# Altium PCB STM32F4Trunk.PcbDoc
Units mm, origin at the board's own origin, x right, y up, seen from the top; angles counter-clockwise.
Board outline 85.1 x 83.9 mm, 4 copper layers (Top Layer, Layer 1, Layer 2, Bottom Layer), stack 0.602 mm thick; 56 components, 48 nets, 292 pads, 7 vias.
Unrouted connection lines stored in the file: 160.
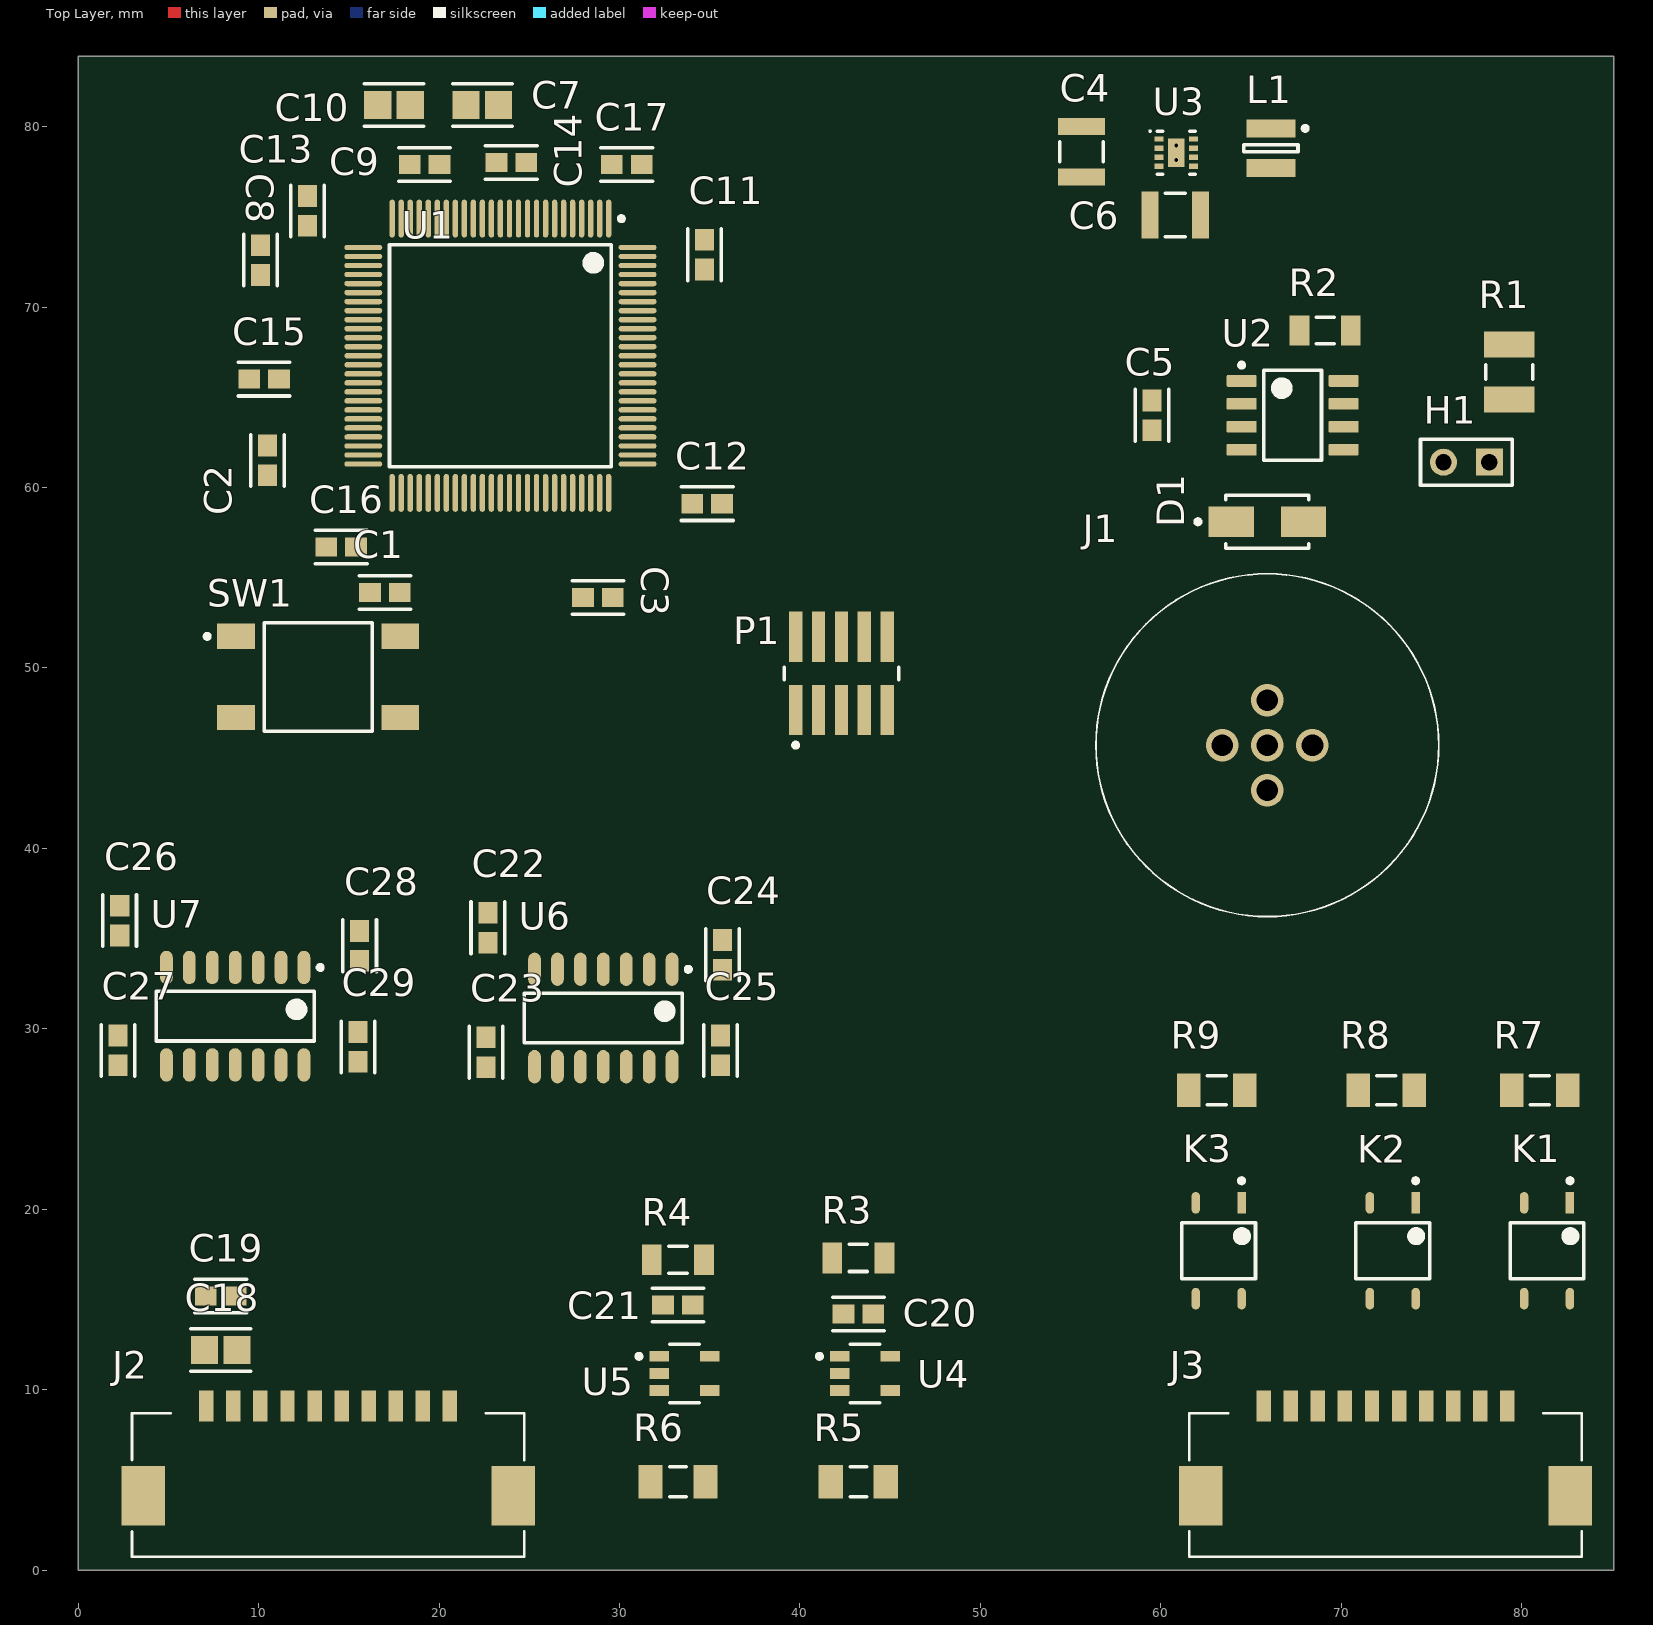
[diagram p0: Top Layer view]
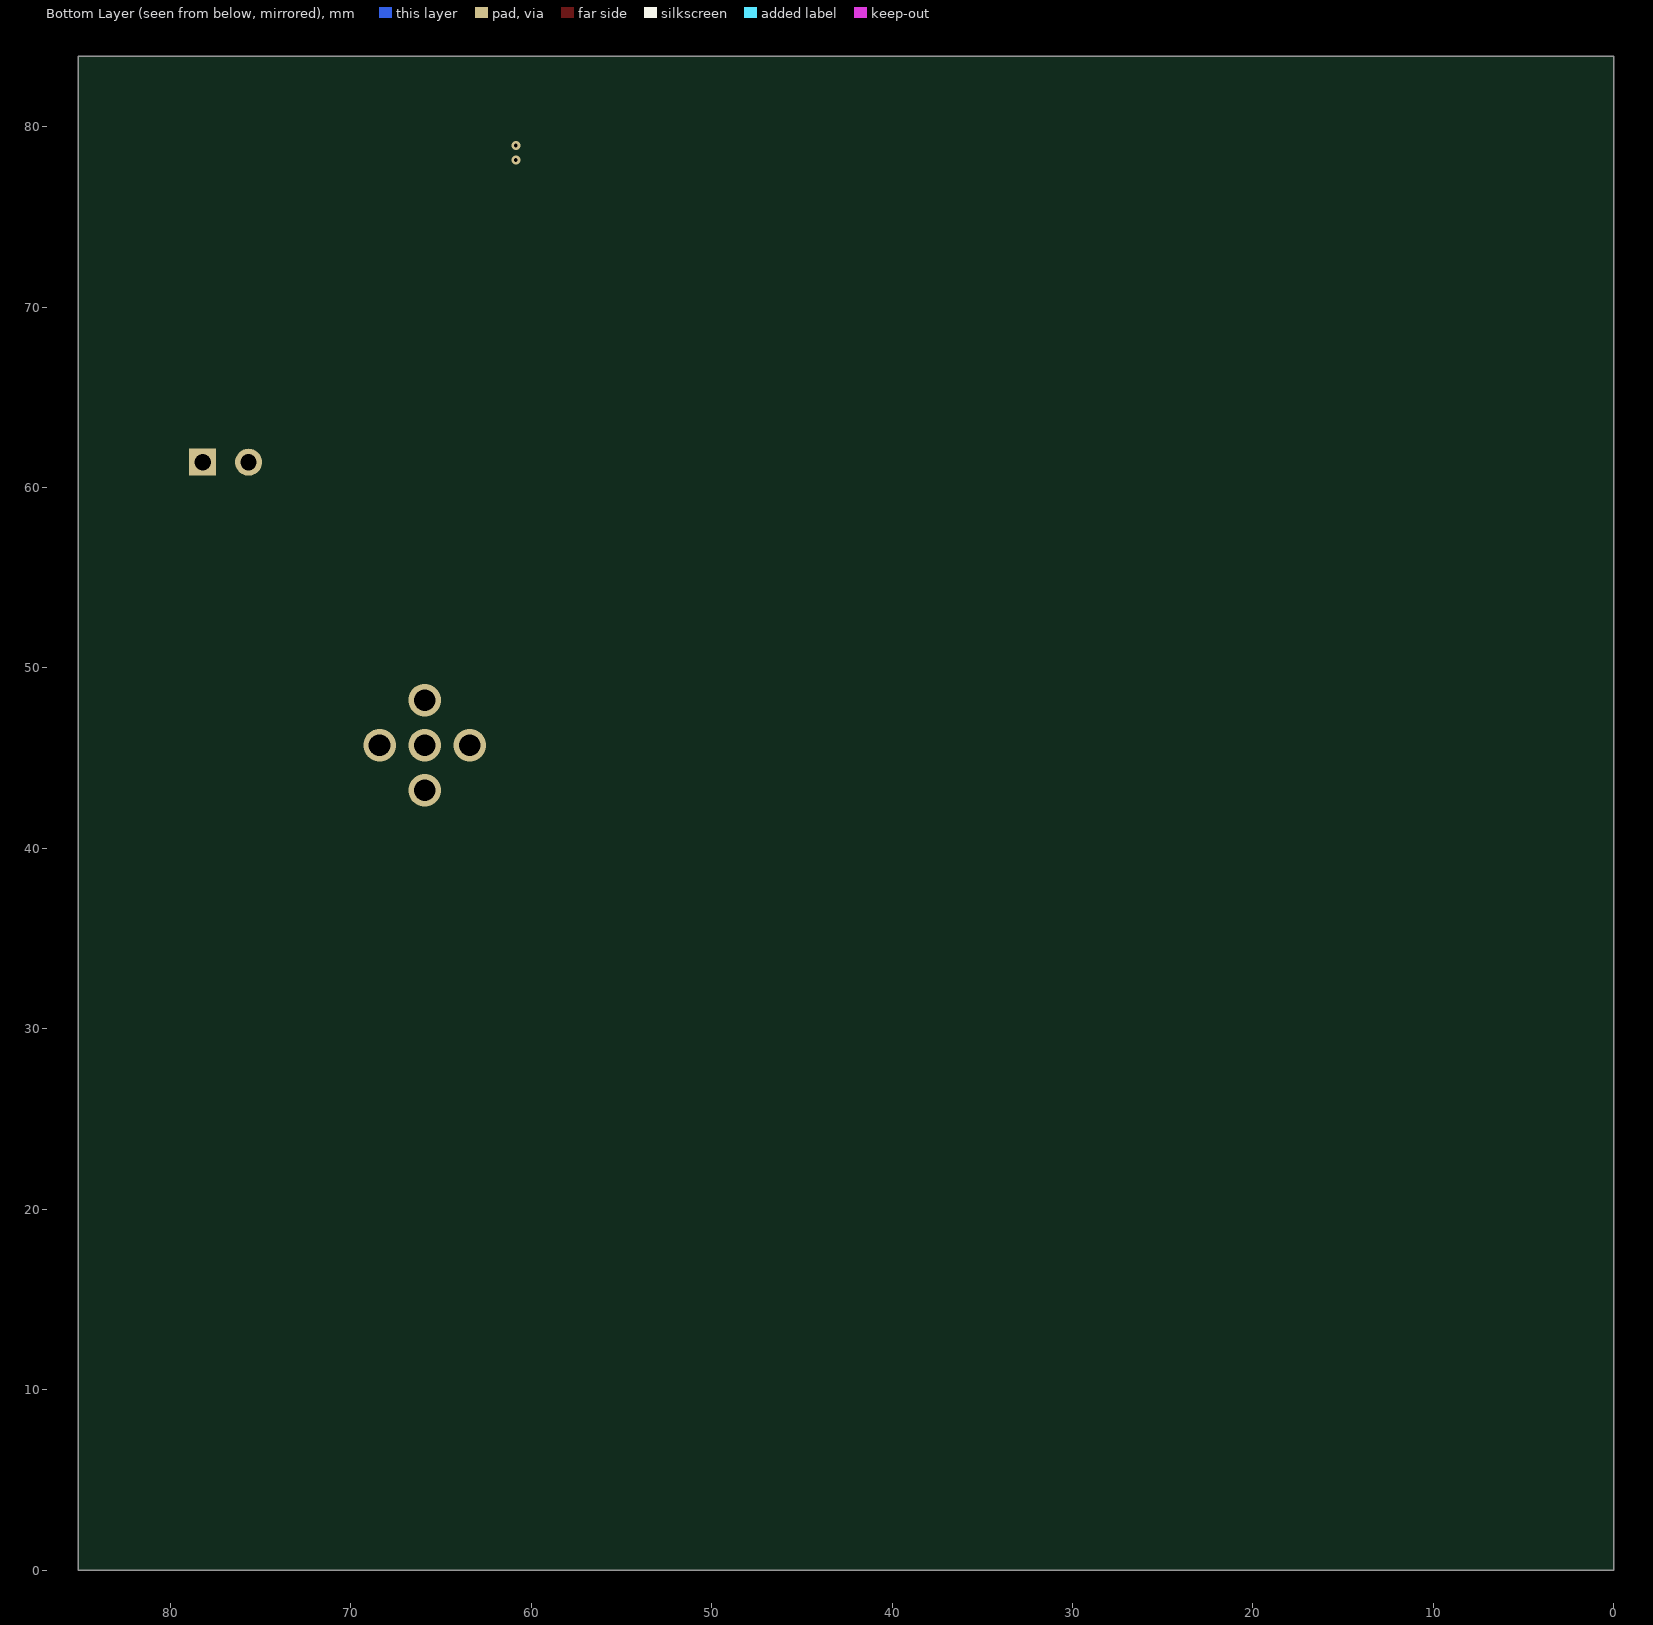
[diagram p1: Bottom Layer view, seen from below]
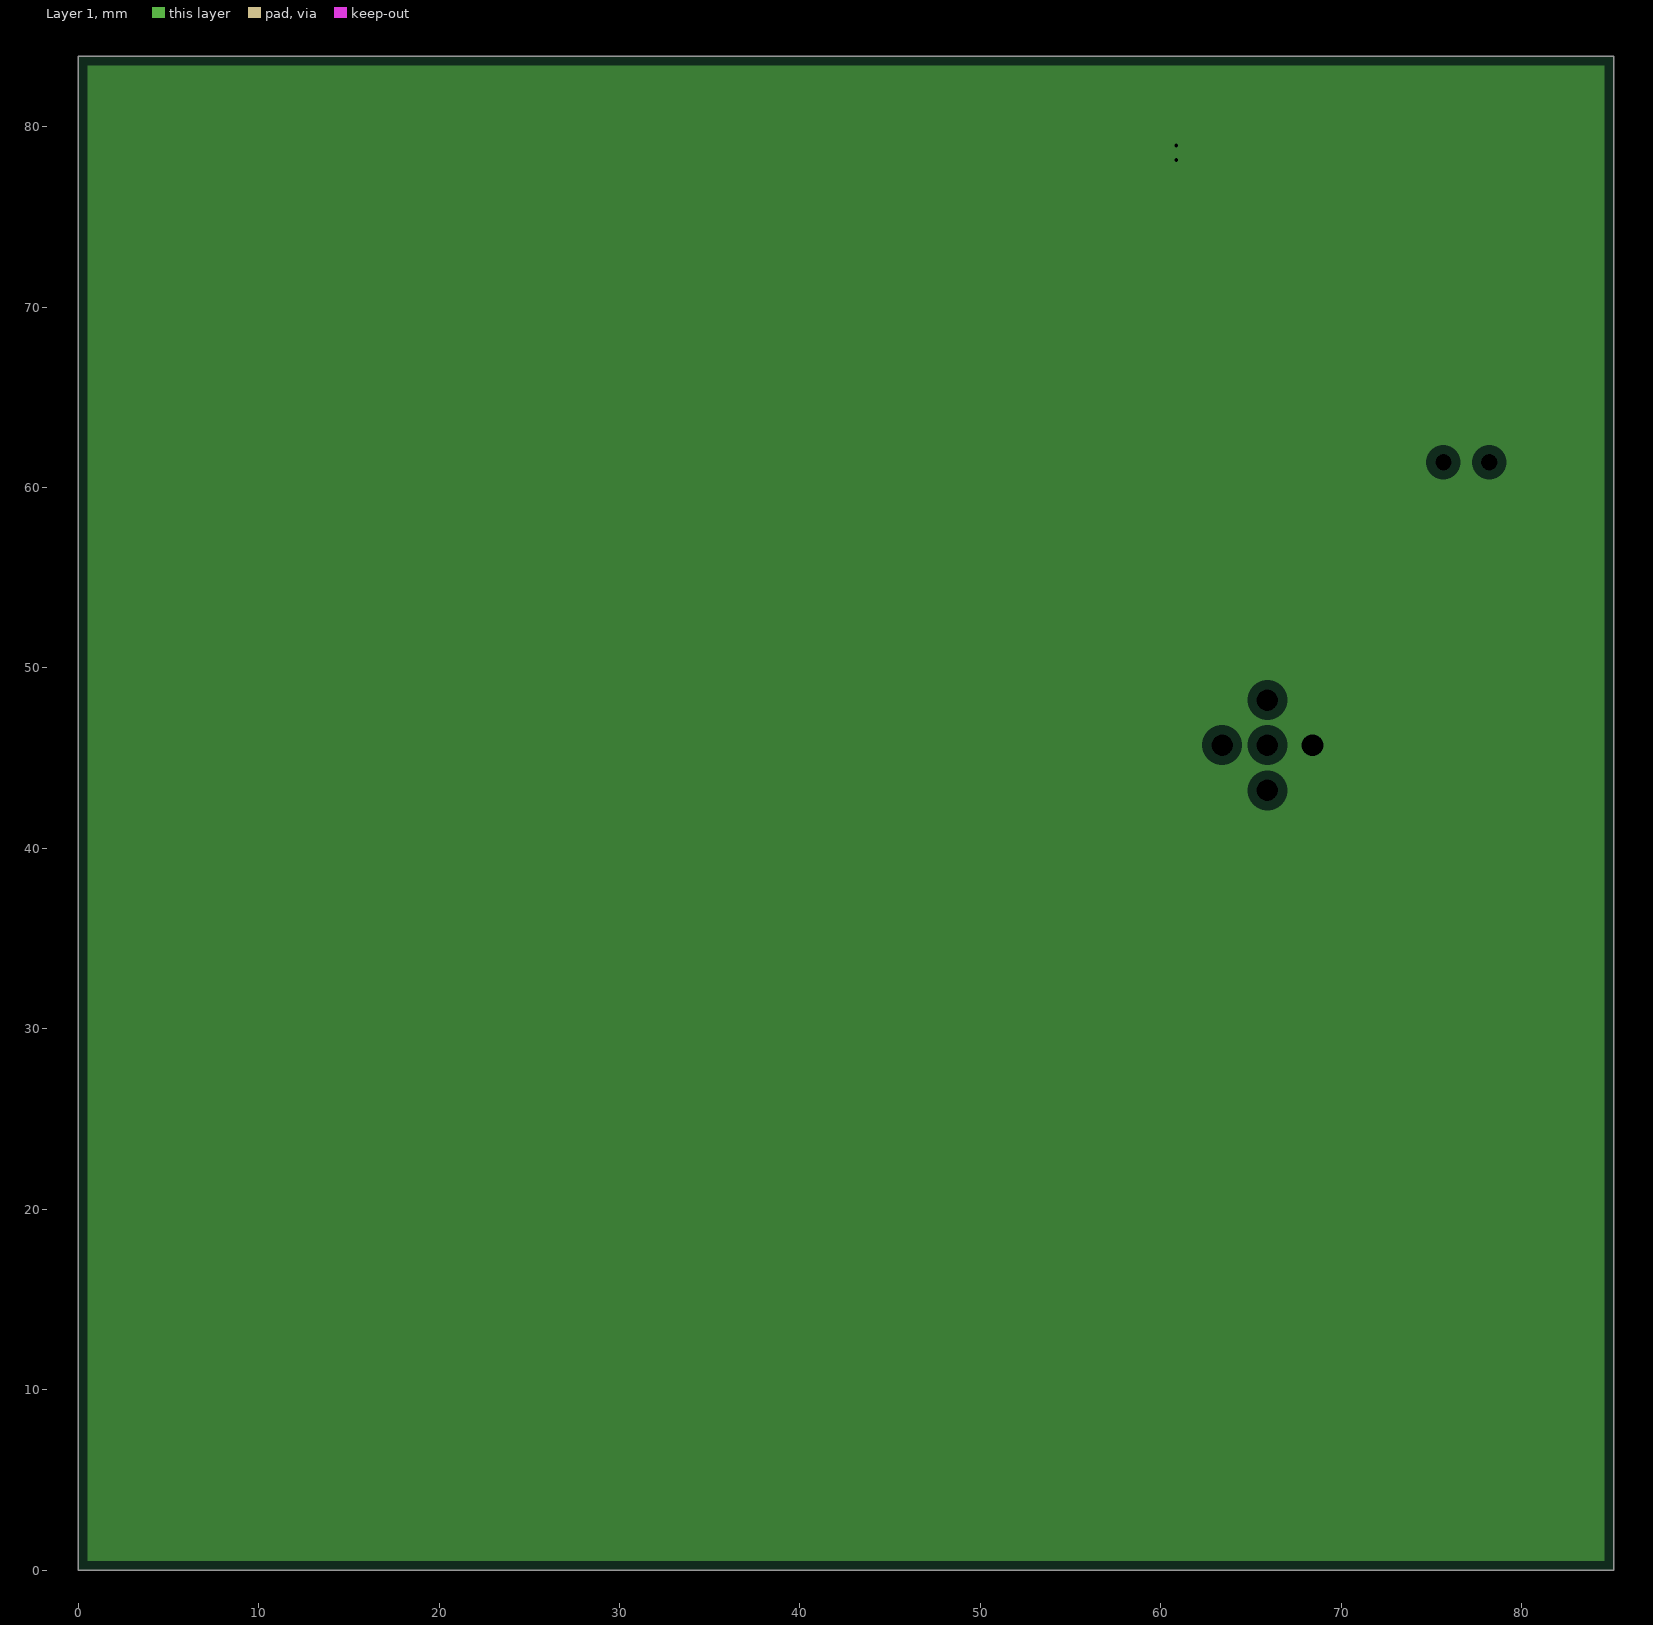
[diagram p2: Layer 1, clearances drawn from the general rule]
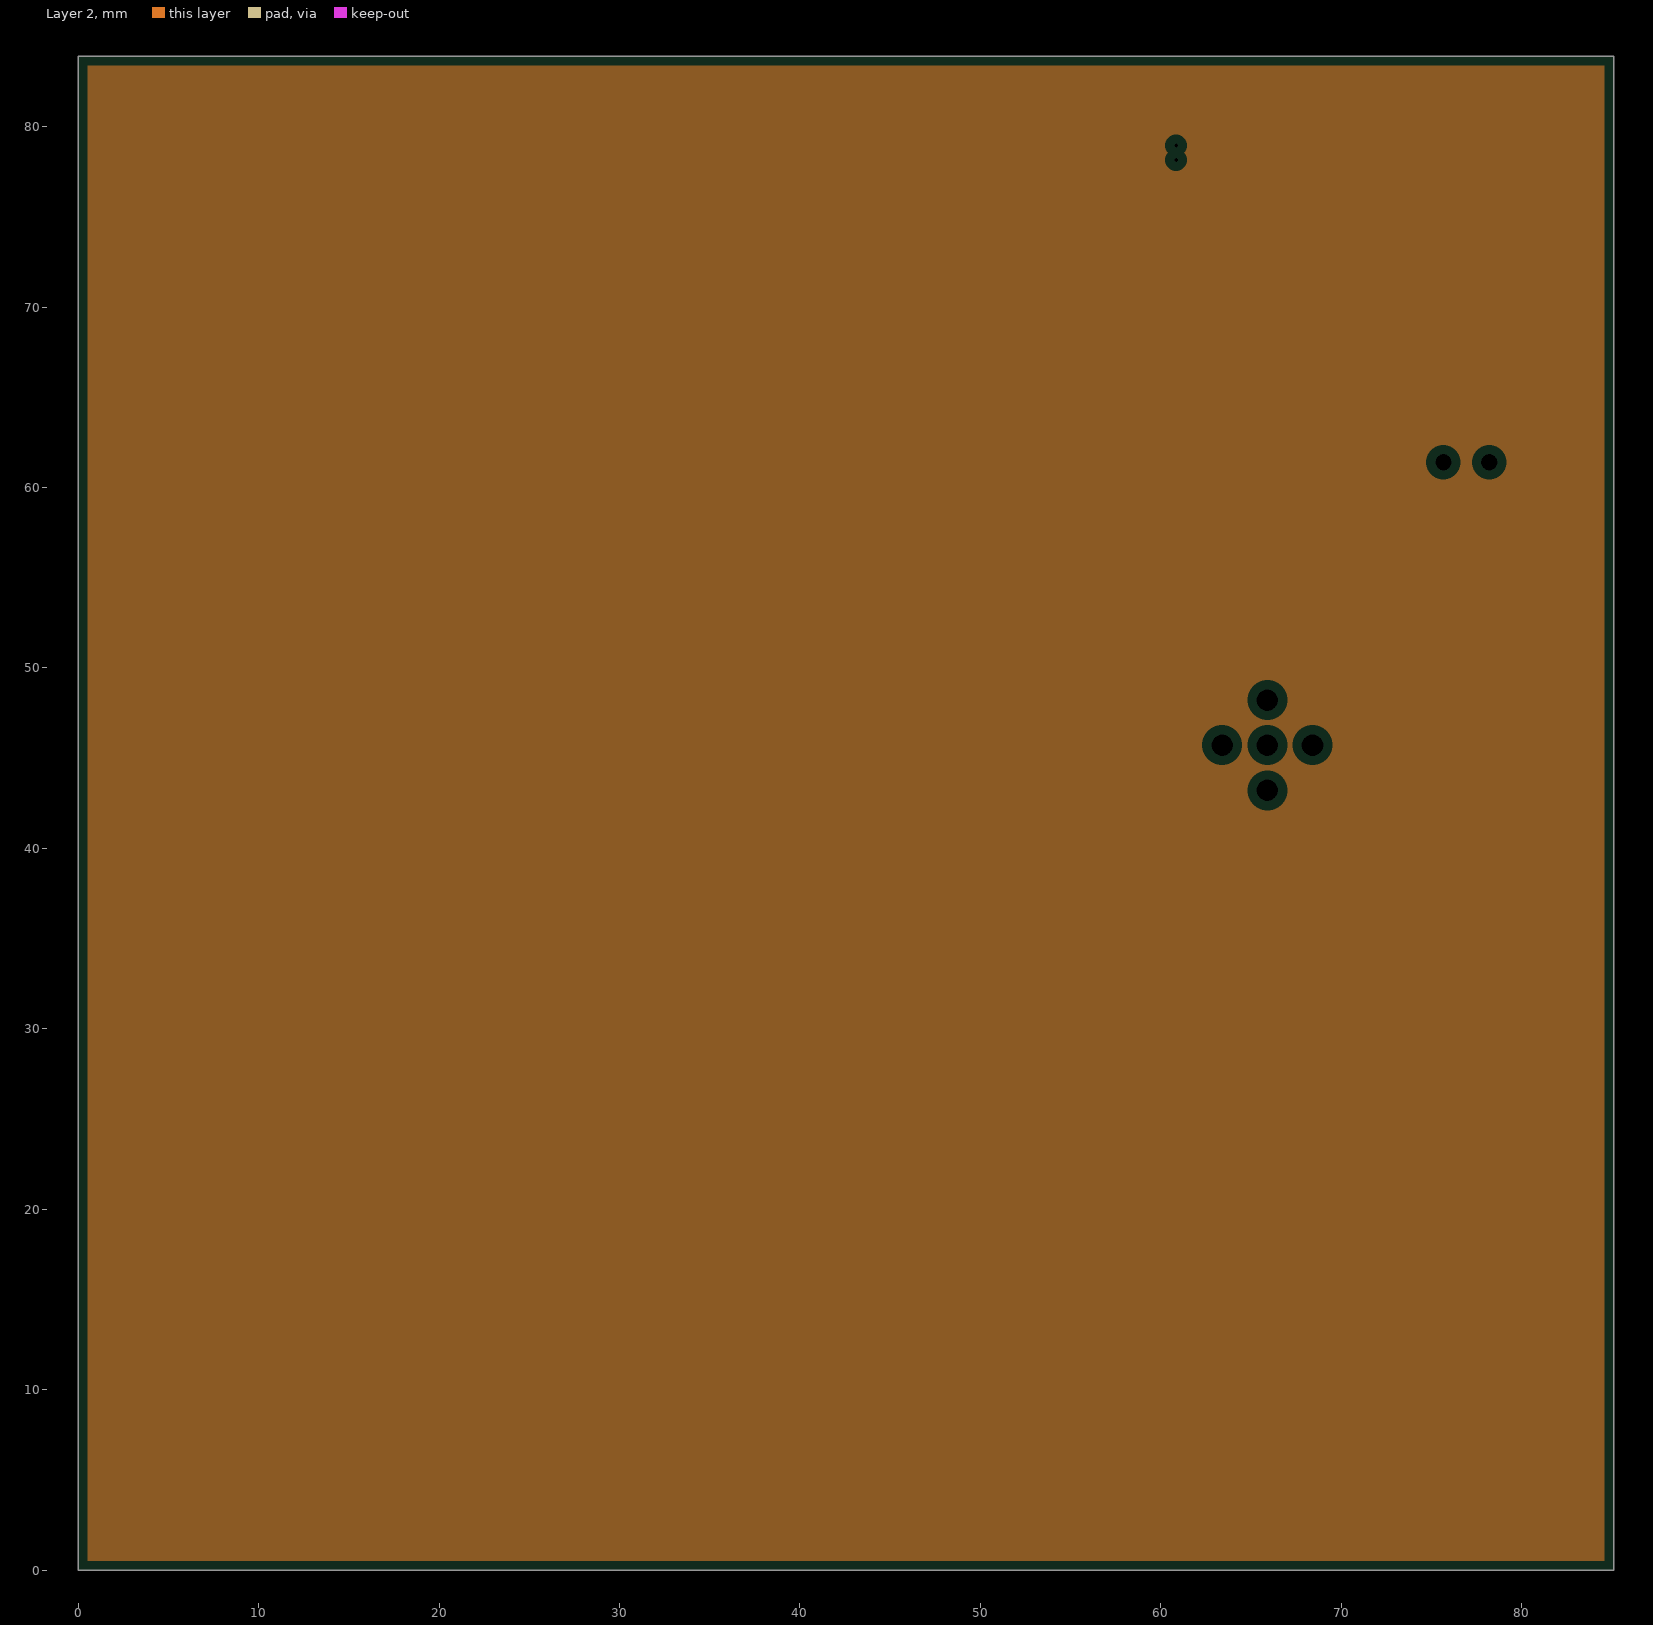
[diagram p3: Layer 2, clearances drawn from the general rule]

## Layer stack, top to bottom
Top Solder: solder mask 0.0102, Solder Resist, Dk 3.5
Top Layer: signal copper 0.035
Dielectric 2: prepreg 0.0711, PP-006, Dk 4.1
Layer 1: plane copper 0.035, net GND
Dielectric 1: dielectric 0.32, FR-4, Dk 4.8
Layer 2: plane copper 0.035, net VCC
Dielectric 3: prepreg 0.0711, PP-006, Dk 4.1
Bottom Layer: signal copper 0.035
Bottom Solder: solder mask 0.0102, Solder Resist, Dk 3.5

## Board outline
0,0 85.1,0 85.1,83.9 0,83.9

## Design rules (kind name [scope] priority, off if disabled: settings)
Clearance [All] p1: gap=0.2 ignorepadtopadclearanceinfootprint=TRUE
MinimumSolderMaskSliver [All] p1: minsoldermaskwidth=0.04
PlaneClearance [All] p1: clearance=0.508
PlaneConnect [All] p1: planeconnectstyle=Relief reliefexpansion=0.508 reliefentries=4 reliefconductorwidth=0.254 reliefairgap=0.254
PolygonConnect [All] p1: connectstyle=Relief reliefconductorwidth=0.254 reliefentries=4 polygonreliefangle="90 Angle" airgapwidth=0.254
RoomDefinition ICs [InComponentClass('ICs')] p1: confinementstyle=ConfineIn formatcopy=TRUE lockcomponents=FALSE outline 0.7,-0.3 86.1,-0.3 86.1,42.7 0.7,42.7
RoomDefinition PowerSupply [InComponentClass('PowerSupply')] p2: confinementstyle=ConfineIn formatcopy=TRUE lockcomponents=FALSE outline 52.5,70.2 82.6,70.2 82.6,83.2 52.5,83.2
RoomDefinition Microcontroller [InComponentClass('Microcontroller')] p3: confinementstyle=ConfineIn formatcopy=TRUE lockcomponents=FALSE outline -0.5,43.3 50.175,43.3 50.175,83 -0.5,83
RoomDefinition Connector [InComponentClass('Connector')] p4: confinementstyle=ConfineIn formatcopy=TRUE lockcomponents=FALSE outline 1.699,-9.122 85.2,-9.122 85.2,17.1 1.699,17.1
RoomDefinition CAN [InComponentClass('CAN')] p5: confinementstyle=ConfineIn formatcopy=TRUE lockcomponents=FALSE outline 49.9,34.5 83.075,34.5 83.075,71.1 49.9,71.1
RoutingVias [All] p1: holewidth=0.711 width=1.27 viastyle="Through Hole" minholewidth=0.711 minwidth=1.27 maxholewidth=0.711 maxwidth=1.27
SMDEntry [All] p1: side=TRUE corner=TRUE anyangle=TRUE
SMDNeckDown [All] p1: percent=100.000
SilkToSolderMaskClearance [IsPad] p1: minsilkscreentomaskgap=0.1 clearancetoexposedcopper=TRUE
SolderMaskExpansion [All] p1: expansion=0.102
Width Power [InNetClass('Power')] p1: maxlimit=0.5 minlimit=0.25 preferedwidth=0.5
Width Width_1 [All] p2: maxlimit=0.254 minlimit=0.254 preferedwidth=0.254
26 further rules are at their usual default settings.

## Classes and differential pairs
component class PowerSupply: C4 C6 L1 U3
component class ICs: C20 C21 C22 C23 C24 C25 C26 C27 C28 C29 K1 K2 K3 R3 R4 R5 R6 R7 R8 R9 U4 U5 U6 U7
net class Power: +12 GND VCC
component class Microcontroller: C1 C2 C3 C7 C8 C9 C10 C11 C12 C13 C14 C15 C16 C17 P1 SW1 U1
component class Connector: C18 C19 H2 J2 J3
component class CAN: C5 D1 H1 J1 R1 R2 U2

## Components (designator, comment, footprint, x,y, rotation, side; value= is the part's Value field where it differs from the comment)
C1 "C0603C104K5RACTU" Kemet_C0603_IPC_A 17,54.188 r180 top
C2 "CC0805KKX7R6BB225" Kemet_C0603_IPC_A 10.5,61.5 r270 top
C3 "CC0805KKX7R6BB225" Kemet_C0603_IPC_A 28.8,53.9 r0 top
C4 "CAP 22uF 16V X7R 1210(3225)" CAPC1210(3225)280_L 55.6,78.6 r90 top value=22uF
C5 "C0603C104K5RACTU" Kemet_C0603_IPC_A 59.5,64 r90 top
C6 "CAP 22uF 16V X7R 1210(3225)" CAPC1210(3225)280_L 60.8,75.1 r0 top value=22uF
C7 "CC0805KKX7R6BB225" Yageo_CC0805-0.85_IPC_A 22.4,81.2 r180 top
C8 "C0603C104K5RACTU" Kemet_C0603_IPC_A 10.1,72.6 r270 top
C9 "C0603C104K5RACTU" Kemet_C0603_IPC_A 19.2,77.9 r180 top
C10 "CC0805KKX7R6BB225" Yageo_CC0805-0.85_IPC_A 17.5,81.2 r180 top
C11 "C0603C104K5RACTU" Kemet_C0603_IPC_A 34.7,72.9 r90 top
C12 "C0603C104K5RACTU" Kemet_C0603_IPC_A 34.858,59.1 r180 top
C13 "C0603C104K5RACTU" Kemet_C0603_IPC_A 12.7,75.326 r90 top
C14 "C0603C104K5RACTU" Kemet_C0603_IPC_A 24,78 r0 top
C15 "C0603C104K5RACTU" Kemet_C0603_IPC_A 10.3,66 r0 top
C16 "C0603C104K5RACTU" Kemet_C0603_IPC_A 14.574,56.7 r180 top
C17 "C0603C104K5RACTU" Kemet_C0603_IPC_A 30.4,77.9 r0 top
C18 "CC0805KKX7R6BB225" Yageo_CC0805-0.85_IPC_A 7.901,12.2 r180 top
C19 "C0603C104K5RACTU" Kemet_C0603_IPC_A 7.9,15.2 r0 top
C20 "C0603C104K5RACTU" Kemet_C0603_IPC_A 43.237,14.2 r0 top
C21 "C0603C104K5RACTU" Kemet_C0603_IPC_A 33.237,14.692 r0 top
C22 "C0603C104K5RACTU" Kemet_C0603_IPC_A 22.7,35.6 r270 top
C23 "C0603C104K5RACTU" Kemet_C0603_IPC_A 22.6,28.7 r270 top
C24 "C0603C104K5RACTU" Kemet_C0603_IPC_A 35.7,34.1 r270 top
C25 "C0603C104K5RACTU" Kemet_C0603_IPC_A 35.6,28.8 r270 top
C26 "C0603C104K5RACTU" Kemet_C0603_IPC_A 2.3,36 r270 top
C27 "C0603C104K5RACTU" Kemet_C0603_IPC_A 2.2,28.8 r270 top
C28 "C0603C104K5RACTU" Kemet_C0603_IPC_A 15.6,34.6 r270 top
C29 "C0603C104K5RACTU" Kemet_C0603_IPC_A 15.5,29 r270 top
D1 "S1J-13-F" Diodes_SMA_0 65.9,58.1 r0 top
H1 "Header 0" HDR1X2 78.2,61.4 r180 top
J1 "1542761" 1542761 65.9,45.717 r0 top
J2 "Part Number: 1-292227-0" CON10_1X10_DRH_H 20.6,9.1 r180 top value=Value
J3 "Part Number: 1-292227-0" CON10_1X10_DRH_H 79.2,9.1 r180 top value=Value
K1 "CPC1008N" IXYS_CPC1008N_IPC_C 81.4,17.7 r270 top
K2 "CPC1008N" IXYS_CPC1008N_IPC_C 72.851,17.7 r270 top
K3 "CPC1008N" IXYS_CPC1008N_IPC_C 63.2,17.7 r270 top
L1 "SRN3015-2R2M" BOUR-SRN3015-2_V 66.1,78.8 r270 top
P1 "FTSH-105-01-L-DV" SMTC-FTSH-105-01-L-DV_V 42.3,49.7 r0 top
R1 "ERJ-14YJ121U" RESC3225X70X50ML20T20 79.3,66.4 r270 top
R2 "ERJ-8GEYJ103V" RESC3216X70X50NL05T20 69.1,68.7 r180 top
R3 "CRCW1206523RFKEA" RESC3216X60X45NL10T20 43.237,17.3 r0 top
R4 "CRCW1206523RFKEA" RESC3216X60X45NL10T20 33.237,17.2 r0 top
R5 "CRCW12061K00FKEA" RESC3216X60X45ML15T20 43.237,4.9 r180 top
R6 "CRCW12061K00FKEA" RESC3216X60X45ML15T20 33.237,4.9 r180 top
R7 "RK73H2BTTD3320F" KOA_Speer_RK73H2B_IPC_A 81,26.6 r0 top
R8 "RK73H2BTTD3320F" KOA_Speer_RK73H2B_IPC_A 72.5,26.6 r0 top
R9 "RK73H2BTTD3320F" KOA_Speer_RK73H2B_IPC_A 63.1,26.6 r0 top
SW1 "TL3301AF260QG" ESWI-TL3301AF260QG_V 13.3,49.5 r0 top
U1 "STM32F407VGT6" STM-LQFP100_M 23.4,67.3 r270 top
U2 "SN65HVD230D" D0008A_M 67.3,64 r0 top
U3 "TPS62172DSGR" DSG8-1600X900TP 60.85,78.55 r0 top
U4 "MCP6001T-I/OT" Microchip_OT_0 43.6,10.9 r0 top
U5 "MCP6001T-I/OT" Microchip_OT_0 33.6,10.9 r0 top
U6 "BTS4160DGA" INF-PG-DSO-14-37_M 29.1,30.6 r270 top
U7 "BTS4160DGA" INF-PG-DSO-14-37_M 8.7,30.7 r270 top

## Footprints (in the part's own frame and the unit in brackets; to place one, negate y for a bottom-side part, rotate by r counter-clockwise, add the part's x,y. Pads: shape width x height; smd on the part's side, far side on the other; paste and mask are expansions set on the pad)
1542761 [mm]
  round 1.8 hole 1.2: 1(-2.5,0) 2(0,-2.5) 3(2.5,0) 4(0,2.5) 5(0,0)
  silkscreen extent -9.5,-9.5 9.5,9.5
BOUR-SRN3015-2_V [mm] "SMD, 2-Leads, Body 3x3mm, Height 1.5mm"
  rect 1x2.7 smd: 1(-1.1,0) 2(1.1,0)
  silkscreen extent -1.22,-1.5 0.2,2.03, body extent -1.5,-1.5 1.5,1.5, height 1.5
CAPC1210(3225)280_L [mm] "Chip Capacitor, Body 3.2x2.5mm, Height 2.8mm, IPC High Density"
  rect 0.95x2.6 smd: 1(-1.4,0) 2(1.4,0)
  silkscreen extent -0.55,-1.2 0.55,1.2, body extent -1.7,-1.4 1.7,1.4, height 2.8
CON10_1X10_DRH_H [mm]
  rect 0.8x1.7 smd: 1(0,0) 2(1.5,0) 3(3,0) 4(4.5,0) 5(6,0) 6(7.5,0) 7(9,0) 8(10.5,0) 9(12,0) 10(13.5,0)
  rect 2.413x3.302 smd: 11(-3.499,4.978) 12(16.999,4.978)
  silkscreen extent -4.12,0.41 17.62,8.36, body extent 0,0 0.25,0.25, height 0.25
D0008A_M [mm] "SOIC, 8-Leads, Body 5x4mm, Pitch 1.27mm, IPC Low Density"
  rrect15% 1.65x0.65 smd: 1(-2.825,1.905) 2(-2.825,0.635) 3(-2.825,-0.635) 4(-2.825,-1.905) 5(2.825,-1.905) 6(2.825,-0.635) 7(2.825,0.635) 8(2.825,1.905)
  silkscreen extent -2.95,-2.5 1.6,2.9, body extent -3,-2.45 3,2.45, height 1.63
Diodes_SMA_0 [mm]
  rect 2.5x1.7 smd paste+0 mask+0: 1(-2,0) 2(2,0)
  silkscreen extent -3.97,-1.46 2.3,1.46, body extent -3.35,-1.56 3.35,1.56, height 0.25
DSG8-1600X900TP [mm] "SON, 8-Leads, Body 2x2mm, Pitch 0.5mm, Thermal Pad 1.6x0.9mm, TI Recommended"
  rect 0.5x0.28 smd paste-0.14 mask+0.07: 1(-0.95,0.75) 2(-0.95,0.25) 3(-0.95,-0.25) 4(-0.95,-0.75) 5(0.95,-0.75) 6(0.95,-0.25) 7(0.95,0.25) 8(0.95,0.75)
  rect 0.9x1.6 smd paste-0.45 mask+0.07: 9(0,0)
  silkscreen extent -1.5,-1.2 1.05,1.25, body extent -1.05,-1.05 1.05,1.05, height 0.8
ESWI-TL3301AF260QG_V [mm] "SMD, 4-Leads, Body 6x6mm"
  rect 2.1x1.4 smd: 1(-4.55,2.25) 2(4.55,2.25) 3(-4.55,-2.25) 4(4.55,-2.25)
  silkscreen extent -6.27,-3 3,3, body extent -3,-3 3,3, height 5.3
HDR1X2 [mm] "Connector; Header; 2 Position"
  rect 1.5x1.5 hole 0.9: 1(0,0)
  round 1.5 hole 0.9: 2(2.54,0)
  silkscreen extent -1.27,-1.27 3.81,1.27
INF-PG-DSO-14-37_M [mm] "SOP, 14-Leads, Body 8.65x3.9mm, Pitch 1.27mm, IPC Low Density"
  oval 1.85x0.7 smd: 1(-2.7,3.81) 2(-2.7,2.54) 3(-2.7,1.27) 4(-2.7,0) 5(-2.7,-1.27) 6(-2.7,-2.54) 7(-2.7,-3.81) 8(2.7,-3.81) 9(2.7,-2.54) 10(2.7,-1.27) 11(2.7,0) 12(2.7,1.27) 13(2.7,2.54) 14(2.7,3.81)
  silkscreen extent -2.82,-4.38 1.38,4.84, body extent -2,-4.38 2,4.38, height 1.75
IXYS_CPC1008N_IPC_C [mm]
  rect 1.197x0.472 smd paste+0 mask+0: 1(-2.656,1.27)
  rrect100% 1.197x0.472 smd paste+0 mask+0: 2(-2.656,-1.27) 3(2.656,-1.27) 4(2.656,1.27)
  silkscreen extent -4,-2.04 1.56,2.04, body extent -3.35,-2.14 3.35,2.14, height 0.25
Kemet_C0603_IPC_A [mm]
  rect 1.206x1.058 smd paste+0 mask+0: 1(-0.826,0) 2(0.826,0)
  silkscreen extent -1.43,-0.93 1.43,0.93
KOA_Speer_RK73H2B_IPC_A [mm]
  rect 1.306x1.858 smd paste+0 mask+0: 1(-1.551,0) 2(1.551,0)
  silkscreen extent -0.52,-0.8 0.52,0.8, body extent -2.7,-1.43 2.7,1.43, height 0.25
Microchip_OT_0 [mm]
  rect 1.1x0.6 smd paste+0 mask+0: 1(-1.4,0.95) 2(-1.4,0) 3(-1.4,-0.95) 4(1.4,-0.95) 5(1.4,0.95)
  silkscreen extent -2.65,-1.63 0.81,1.63, body extent -2.05,-1.78 2.05,1.78, height 0.25
RESC3216X60X45ML15T20 [mm] "Chip Resistor, 2-Leads, Body 3.3x1.75mm, IPC Low Density"
  rect 1.35x1.85 smd: 1(-1.525,0) 2(1.525,0)
  silkscreen extent -0.45,-0.82 0.45,0.82, body extent -1.65,-0.87 1.65,0.87, height 0.6
RESC3216X60X45NL10T20 [mm] "Chip Resistor, 2-Leads, Body 3.20x1.60mm, IPC Medium Density"
  rect 1.1x1.7 smd: 1(-1.45,0) 2(1.45,0)
  silkscreen extent -0.5,-0.75 0.5,0.75, body extent -1.65,-0.85 1.65,0.85, height 0.6
RESC3216X70X50NL05T20 [mm] "Chip Resistor, 2-Leads, Body 3.20x1.60mm, IPC Medium Density"
  rect 1.1x1.65 smd: 1(-1.425,0) 2(1.425,0)
  silkscreen extent -0.5,-0.72 0.5,0.72, body extent -1.63,-0.82 1.62,0.82, height 0.7
RESC3225X70X50ML20T20 [mm] "Chip Resistor, 2-Leads, Body 3.20x2.50mm, IPC Low Density"
  rect 1.45x2.8 smd: 1(-1.525,0) 2(1.525,0)
  silkscreen extent -0.4,-1.3 0.4,1.3, body extent -1.7,-1.35 1.7,1.35, height 0.7
SMTC-FTSH-105-01-L-DV_V [mm] "CONN, 10-Leads, Body 6.35x3.43mm, Pitch 1.27mm"
  rect 0.74x2.79 smd: 1(-2.54,-2.035) 2(-2.54,2.035) 3(-1.27,-2.035) 4(-1.27,2.035) 5(0,-2.035) 6(0,2.035) 7(1.27,-2.035) 8(1.27,2.035) 9(2.54,-2.035) 10(2.54,2.035)
  silkscreen extent -3.17,-4.1 3.18,0.34, body extent -3.17,-2.92 3.18,2.92, height 5.96
STM-LQFP100_M [mm] "Thin QFP, 100-Leads, Body 14x14mm, Pitch 0.5mm, IPC Low Density"
  oval 2.1x0.3 smd: 1(-7.6,6) 2(-7.6,5.5) 3(-7.6,5) 4(-7.6,4.5) 5(-7.6,4) 6(-7.6,3.5) 7(-7.6,3) 8(-7.6,2.5) 9(-7.6,2) 10(-7.6,1.5) 11(-7.6,1) 12(-7.6,0.5) 13(-7.6,0) 14(-7.6,-0.5) 15(-7.6,-1) 16(-7.6,-1.5) 17(-7.6,-2) 18(-7.6,-2.5) 19(-7.6,-3) 20(-7.6,-3.5) 21(-7.6,-4) 22(-7.6,-4.5) 23(-7.6,-5) 24(-7.6,-5.5) 25(-7.6,-6) 51(7.6,-6) 52(7.6,-5.5) 53(7.6,-5) 54(7.6,-4.5) 55(7.6,-4) 56(7.6,-3.5) 57(7.6,-3) 58(7.6,-2.5) 59(7.6,-2) 60(7.6,-1.5) 61(7.6,-1) 62(7.6,-0.5) 63(7.6,0) 64(7.6,0.5) 65(7.6,1) 66(7.6,1.5) 67(7.6,2) 68(7.6,2.5) 69(7.6,3) 70(7.6,3.5) 71(7.6,4) 72(7.6,4.5) 73(7.6,5) 74(7.6,5.5) 75(7.6,6)
  oval 0.3x2.1 smd: 26(-6,-7.6) 27(-5.5,-7.6) 28(-5,-7.6) 29(-4.5,-7.6) 30(-4,-7.6) 31(-3.5,-7.6) 32(-3,-7.6) 33(-2.5,-7.6) 34(-2,-7.6) 35(-1.5,-7.6) 36(-1,-7.6) 37(-0.5,-7.6) 38(0,-7.6) 39(0.5,-7.6) 40(1,-7.6) 41(1.5,-7.6) 42(2,-7.6) 43(2.5,-7.6) 44(3,-7.6) 45(3.5,-7.6) 46(4,-7.6) 47(4.5,-7.6) 48(5,-7.6) 49(5.5,-7.6) 50(6,-7.6) 76(6,7.6) 77(5.5,7.6) 78(5,7.6) 79(4.5,7.6) 80(4,7.6) 81(3.5,7.6) 82(3,7.6) 83(2.5,7.6) 84(2,7.6) 85(1.5,7.6) 86(1,7.6) 87(0.5,7.6) 88(0,7.6) 89(-0.5,7.6) 90(-1,7.6) 91(-1.5,7.6) 92(-2,7.6) 93(-2.5,7.6) 94(-3,7.6) 95(-3.5,7.6) 96(-4,7.6) 97(-4.5,7.6) 98(-5,7.6) 99(-5.5,7.6) 100(-6,7.6)
  silkscreen extent -7.72,-6.15 6.15,6.83, body extent -7,-7 7,7, height 1.6
Yageo_CC0805-0.85_IPC_A [mm]
  rect 1.505x1.556 smd paste+0 mask+0: 1(-0.901,0) 2(0.901,0)
  silkscreen extent -1.65,-1.18 1.65,1.18, body extent -2.15,-1.28 2.15,1.28, height 0.25

## Part data
C2 C3 C7 C10 C18: "2.2UF"
C4 C6: library part CMP-1038-02277-1, "CAP 22uF 16V ±10% 1210 (3225 Metric) Thickness 2.8mm SMD", Case-EIA=1210, Case-Metric=3225, Rated Voltage="16 V", Tolerance=±10%, Max Thickness="2.8 mm", Technology=SMT
C8 C9 C11 C12 C13 C14 C15 C16 C17 C19 C20 C21 C22 C23 C24 C25 C26 C27 C28 C29: "CAP CER 0.1UF 100NF 50V X7R 0603"
H1: library part "Header 2", "Header, 2-Pin", LatestRevisionDate=17-Jul-2002, LatestRevisionNote="Re-released for DXP Platform.", Publisher="Altium Limited"
J1: "Connector", Manufacturer_Name="Phoenix Contact", Mouser Part Number=651-1542761, RS Part Number=8025583, Allied_Number=70170366, Allied Price/Stock=https://www.alliedelec.com/phoenixcontact-1542761/70170366/, Datasheet Link=https://media.digikey.com/PDF/Data%20Sheets/Phoenix%20Contact%20PDFs/1542761.pdf, Height=18mm, Manufacturer_Part_Number=1542761, Mouser Price/Stock=https://www.mouser.com/Search/Refine.aspx?Keyword=651-1542761, RS Price/Stock=http://uk.rs-online.com/web/p/products/8025583
J2 J3: library part 1-292227-0, "No Description Available", Built_By=EMA_UL_Team, Copyright="Copyright (C) 2018 Accelerated Designs. All rights reserved", Manufacturer_Part_Number=1-292227-0, RefDes=RefDes, Type=DEV, Vendor="TE Connectivity"
L1: library part CMP-0007-00003-1, "Semi-shielded Power Inductor, 2.2 uH, +/- 20%, 1.8 A, -40 to 125 degC, 3 x 3 x 1.5 mm SMD, RoHS and Halogen Free, Tape and Reel", Inductance="2.2 uH", Inductance tolerance="+/- 20%", Manufacturer=Bourns, Operating Temperature="-40 to 125 degC", Rated Current="1.8 A", Resistance to Solder Heat="+260 degC for 10 sec.", ComponentLink1Description="Manufacturer URL", ComponentLink1URL=http://www.bourns.com/, ComponentLink2Description=Datasheet, ComponentLink2URL=http://www.bourns.com/data/global/pdfs/SRN3015.pdf, ComponentLink3Description="Package Specification", ComponentLink3URL=http://www.bourns.com/data/global/pdfs/SRN3015.pdf, DatasheetVersion=Aug-11, DCR Max="0.072 Ohm", Isat="1.65 A", Mounting Technology="Surface Mount", PackageDescription="2-Pin SMD, Body 3 x 3 mm, Height 1.5 mm", PackageReference=SRN3015, Packing="Tape and Reel", PartNumber=SRN3015-2R2M, RoHS=TRUE, SRF Min="90 MHz"
P1: library part CMP-2000-05354-1, "Male Header, Pitch 1.27 mm, 2 x 5 Position, Height 5.96 mm, -55 to 125 degC, RoHS, Bulk", Color=Black, Manufacturer=Samtec, Standard Package=1, Catalog Drawings=FTSHSeriesFTSHSeriesSMTSide, Category=Connectors,Interconnects, Connector Type=Header,Unshrouded, Contact Finish=Gold, Contact Finish Thickness=10µin(0.25µm), Contact Mating Length="0.120\"(3.05mm)", Contact Type=MalePin, Datasheet URL=https://datasheet.ciiva.com/30493/0900766b80adfe36-30493006.pdf, Datasheet Version=Feb-08, EDA / CAD Models=DownloadfromAcceleratedDesigns, Family=RectangularConnectors-Headers,MalePins, Fastening Type=-, Featured Product=Board-To-BoardInterconnectSystems, Features=-, Manufacturer URL=http://www.samtec.com/, Mating Products="FLE-105-01-G-DV-TR-ND-CONNSKT1.27MM10POSDUALSMDCLP-105-02-G-D-P-TR-ND-CONNRCPT10POSDUAL.05\"SMDSFMC-105-L2-S-D-TR-ND-CONN.05\"SURFACE10POSSMTSFMH-105-02-L-D-TR-ND-CONNRECEPT10POS.50\"SMTFLE-105-01-G-DV-A-ND-CONNSKT1.27MM10POSDUALSMDCLP-105-02-G-D-BE-ND-CONNRCPT10POSDUAL.05\"SMDFLE-105-01-G-DV-A-P-ND-CONNSKT1.27MM10POSDUALSMDSAM1153-05-ND-CONNRCPT10POSDUAL.05\"SMDSAM1155-05-ND-CONNRCPT10POSDUAL.05\"SMDSAM1154-05-ND-CONNRCPT10POSDUAL.05\"SMDSFMH-105-02-L-D-LC-ND-CONNRECEPT10POS.50\"SMTSAM1226-05-ND-CONNRCPT.05\"10POSDUALSMD", Mounting Type=SurfaceMount, Number of Positions=10, Number of Positions Loaded=All, Number of Rows=2, Online Catalog=FTSHSeries, Other Names=SAM1161-05, Packaging=Bulk, Pitch="0.050\"(1.27mm)", Product Training Modules=Board-to-BoardConnectors, Row Spacing="0.050\"(1.27mm)", Series=FTSH, Termination=Solder
R1: library part CMP-2005-03490-1, "120Ohm", Manufacturer=Panasonic, Part Number=ERJ-14YJ121U
R2: library part CMP-2003-00545-1, "10k", Manufacturer=Panasonic, Part Number=ERJ-8GEYJ103V
R3 R4: library part CMP-2003-02266-1, "523Ohm", Manufacturer="Vishay Dale", Part Number=CRCW1206523RFKEA
R5 R6: library part CMP-2100-03616-1, "Chip Resistor, 1 KOhm, +/- 1%, 0.25 W, -55 to 155 degC, 1206 (3216 Metric), RoHS, Tape and Reel", Case/Package=1206, Case Code (Metric)=3216, Manufacturer="Vishay Semiconductor", Max Operating Temperature=155degC, Max Power Dissipation=250mW, Min Operating Temperature=-55degC, Package Description="2-Pin Surface Mount Device, Body 3.15 x 1.6 mm", Package Quantity=10, Package Reference=1206.0, Resistance=1KOhm, Temperature Coefficient=100ppm/degreesC, Tolerance=1%, Voltage Rating=200V, Case Code (Imperial)=1206, Composition=ThickFilm, Contact Plating=Tin, Datasheet URL=http://www.farnell.com/datasheets/1720486.pdf, Datasheet Version=41061.0, Depth=1.6mm, Height=0.55mm, Lead Free=LeadFree, Length=3.2mm, Manufacturer URL=http://www.vishay.com/, Military Standard=Not, Mount=SurfaceMount, Number of Pins=2, Number of Terminations=2, Packaging=TapeandReel, Power Rating=250mW, Radiation Hardening=No, REACH SVHC=Unknown, RoHSCompliant=true, Termination=SMD/SMT, Voltage Rating (DC)=200V, Weight=0.000353oz, Width=0.063inch
R7 R8 R9: "332Ohm"
SW1: library part CMP-2000-07249-1, "Tactile Switch, SPST-NO, 50 mA, 12 V, -20 to 70 degC, 4-Pin SMD, RoHS, Tape and Reel", Contact Rating @ Voltage=0.05A@12VDC, Illumination Type, Color=-, Manufacturer=E-Switch, Operating Force=260gf, Operating Temperature=-20°C~70°C, Package Description="4-Pin Surface Mount Device, Body 6 x 6 mm", Package Version="Rev. D, 10/2014", Standard Package=1, 3D Model=TL3301AFyyyyG.stp, Actuator Height off PCB, from Pins=5.00mm, Actuator Material=Polyamide(PA),Nylon, Actuator Orientation=TopActuated, Actuator Type=Standard, Catalog Drawings=TL3301xFFootprint, Category=Switches, Circuit=SPST-NO, Datasheet URL=https://www.e-switch.com/system/asset/product_line/data_sheet/185/TL3301.pdf, Datasheet Version=12/2013, Family=TactileSwitches, Featured Product=TL3301SeriesTactSwitch, Features=-, Illumination=Non-Illuminated, Illumination Voltage (Nominal)=-, Ingress Protection=-, Manufacturer URL=http://www.e-switch.ch/en/, Mechanical Life=100,000Cycles, Mounting Technology=SurfaceMount, Mounting Type=SurfaceMount, Online Catalog=TL3301Series, Other Names=EG2527DKR, Outline=6.00mmx6.00mm, Package Reference=TL3301AF260QG, Package URL=http://spec_sheets.e-switch.com/specs/P010513.pdf, Packaging=Digi-Reel®, Product Training Modules=SwitchBasics, RoHS Information=TL3301SeriesRoHSCertofCompliance, Series=TL3301, Switch Function=Off-Mom, Switch Travel=0.25mm, Termination Style=GullWing
U1: library part CMP-0243-00017-3, "ARM Cortex-M4 32-bit MCU+FPU, 210 DMIPS, 1024 kB Flash, 192 kB Internal RAM, 82 I/Os, 100-pin LQFP, -40 to 85 degC, Tray", I/Os (High Current)=82, Manufacturer=STMicroelectronics, Operating Frequency(F) (Processor speed) (MHz)=168, Supply Voltage(Vcc) max (V)=3.6, Supply Voltage(Vcc) min (V)=1.8, ComponentLink1Description="Manufacturer URL", ComponentLink1URL=http://www.st.com/web/en/home.html, ComponentLink2Description=Datasheet, ComponentLink2URL=http://www.st.com/st-web-ui/static/active/en/resource/technical/document/datasheet/DM00037051.pdf, ComponentLink3Description="Package Specification", ComponentLink3URL=http://www.st.com/st-web-ui/static/active/en/resource/technical/document/data_brief/DM00071938.pdf, Core="ARM Cortex-M4", D/A Converter=2x12-bit, DatasheetVersion="Rev. 4", FLASH Size (Prog) (kB)=1024, Internal RAM Size (kB)=192, Mounting Technology="Surface Mount", PackageDescription="100-Pin Low Profile Quad Flat Package, 14 x 14 mm Body, 0.5 mm Pitch", PackageReference=LQFP100, PackageVersion="Rev. 1, 06/2013", Packing=Tray, PartNumber=STM32F407VGT6
U2: library part CMP-0315-00046-3, "CAN Bus Transceiver, 3.3 V, -40 to 85 degC, 8-Pin SOIC (D), Green (RoHS & no Sb/Br), Tube", Generic Part Number=SN65HVD230, Supply Voltage Max="3.6 V", Supply Voltage Min="3 V", Temperature Max="85 degC", Temperature Min="-40 degC", ComponentLink1Description="Manufacturer URL", ComponentLink1URL=http://www.ti.com/, ComponentLink2Description=Datasheet, ComponentLink2URL="http://www.ti.com/general/docs/lit/getliterature.tsp?genericGeneric Part Number=SN65HVD230&fileType=pdf", DatasheetVersion=SLOS346N, Mounting Technology="Surface Mount", PackageDescription="8-Pin Plastic Small Outline, Body 4.9 x 3.9 mm, Pitch 1.27 mm", Packing=Tube, PartNumber=SN65HVD230D, RoHS=TRUE
U3: "Buck Step Down Regulator with 3 to 17 V Input and 3.3 V Output, -40 to 85 degC, 8-Pin WSON (DSG), Green (RoHS & no Sb/Br)", Manufacturer="Texas Instruments", Rating=Catalog, Switch Current Limit(Typ)(A)=1.05, Code_JEDEC=MO-229, ComponentLink1Description=Datasheet, ComponentLink1URL=http://www.ti.com/general/docs/lit/getliterature.tsp?genericPartNumber=TPS62172&fileType=pdf, ComponentLink2Description="Package Specification", ComponentLink2URL=http://www.ti.com/litv/pdf/mpds308a, ComponentLink3Description="URL Link1", ComponentLink3URL="Samples URL:http://www.ti.com/product/tps62172#samples", DatasheetVersion=SLVSAT8A, Duty Cycle(Max)(%)=100, Eco-Plan="Green (RoHS & no Sb/Br)", Iout(Max)(A)=0.5, Iq(Typ)(mA)=0.017, Mounting Technology="Surface Mount", PackageDescription="8-Pin Plastic Small Outline No-Lead, 2 x 2 x 0.8 mm Body, 0.5 mm Pitch, Exposed Pad", PackageReference=DSG8-1600X900TP, PackageVersion="revB, Oct-2010", PartNumber=TPS62172DSGR, Preset Vout(V)=3.3, Regulated Outputs(#)=1, SubFamily="Step-Down Regulator", Synchronous Rectification=TRUE, Topology=Buck, Vin(Max)(V)=17, Vin(Min)(V)=3, Vout(Max)(V)=3.3, Vout(Min)(V)=3.3
U4 U5: library part CMP-0187-00462-2, "1 MHz, Low-Power Operational Amplifier, 5-Pin SOT-23, Industrial Temperature, Tape and Reel", Code_IPC=SOT23-5, ComponentLink1Description="Manufacturer URL", ComponentLink1URL=http://www.microchip.com/, ComponentLink2Description=Datasheet, ComponentLink2URL=http://ww1.microchip.com/downloads/en/DeviceDoc/21733j.pdf, ComponentLink3Description="Package Specification", ComponentLink3URL=http://www.microchip.com/stellent/groups/techpub_sg/documents/packagingspec/en012702.pdf, DatasheetVersion="revJ, Nov-2009", PackageDescription="5-Lead Plastic Small Outline Transistor (OT) [SOT-23]", PackageReference=SOT-23-OT5, PackageVersion="revBB, Aug-2009", RevisionNote="URLs added."
U6 U7: "Smart High-Side Power Switch, 2 Channels, 1.7 A Load Current, -40 to 150 degC, PG-DSO-14-37, Reel, Green", Load Current (typ)="1.7 A", Manufacturer=Infineon, Recommended Operating Voltage Max.="20 V", Recommended Operating Voltage Min.="5.5 V", Channels=2, ComponentLink1Description="Manufacturer URL", ComponentLink1URL=http://www.infineon.com/, ComponentLink2Description=Datasheet, ComponentLink2URL=http://www.infineon.com/dgdl/BTS+4160DGA_DS2008_03_18_neu.pdf?folderId=db3a304314dca389011537739e37155f&fileId=db3a30431a5c32f2011a957ab5875685&sId=db3a30433d68e984013d7cba76cc57cb, ComponentLink3Description="Package Specification", ComponentLink3URL=http://www.infineon.com/dgdl/BTS723GWDS11_2007_09_25.pdf?folderId=db3a304314dca389011537739e37155f&fileId=db3a304331c8f8560131dbfec21b0da9&sId=db3a30443d67b5ca013d854df2f133e5, DatasheetVersion="Rev. 1.0", Green=TRUE, Group="Automotive Qualified", Halogen-free=TRUE, Mounting Technology="Surface Mount", PackageDescription="14-Pin Plastic (Green) Dual Small Outline Package, 8.65 x 3.9 mm Body, 1.27 mm Pitch", PackageReference=PG-DSO-14-37, PackageVersion=Sep-07, Packing=Reel, PartNumber=BTS4160DGA, Ptot (max)="1.4 W", RON(max) @ 150degreesC="320 mOhm", RON @ 25degreesC="160 mOhm", toff (max)="270 us", ton (max)="250 us"

## Via types
v1: diameter 1.8, hole 1.2, Top Layer to Bottom Layer, 5 vias
v2: diameter 0.5, hole 0.2, Top Layer to Bottom Layer, 2 vias

## Nets (pads, with @x,y where several pads share a name; then routed paths per layer and width w, separated by ;. In a path a pad name is that pad's centre, name@x,y a point inside that pad or via, vN(x,y) a via of type N, cw(c..) or ccw(c..) an arc to the next point about the centre after c; other vN are vias at no path point)
+3.3: C18.2 C19.1 J2.10
+12: C4.2 C20.2 C21.2 C22.2 C23.2 C24.2 C25.2 C26.2 C27.2 C28.2 C29.2 D1.1 J1.2 U3.2 U3.3 U4.5 U5.5 U6.1 U6.7 U6.8 U6.14 U7.1 U7.7 U7.8 U7.14
  other v1: 65.9,43.217
GND: C1.2 C2.2 C3.2 C4.1 C5.2 C6.1 C7.1 C8.1 C9.1 C11.1 C12.1 C13.1 C14.2 C15.2 C16.2 C17.2 C18.1 C19.2 C20.1 C21.1 C22.1 C23.1 C24.1 C25.1 C26.1 C27.1 C28.1 C29.1 D1.2 J1.3 J2.9 K1.2 K2.2 K3.2 P1.3 P1.5 P1.9 R2.2 R5.2 R6.2 SW1.3 SW1.4 U1.10 U1.20 U1.27 U1.74 U1.99 U2.2 U3.1 U3.4 U3.5 U3.8 U3.9 U4.2 U5.2 U6.2 U7.2
  other v1: 68.4,45.717
  other v2: 60.85,78.15 60.85,78.95
NetC1_1: C1.1 SW1.2 U1.14
NetC2_1: C2.1 U1.49
NetC3_1: C3.1 U1.73
NetC7_2: C7.2 C10.1
NetH1_1: H1.1 R1.2
NetH1_2: H1.2 J1.5 U2.6
  other v1: 65.9,45.717
NetJ1_4: J1.4 R1.1 U2.7
  other v1: 65.9,48.217
NetJ2_1: J2.1 U1.33
NetJ2_2: J2.2 U1.34
NetJ2_3: J2.3 R4.1 U5.1
NetJ2_4: J2.4 R3.1 U4.1
NetJ2_5: J2.5 U7.12 U7.13
NetJ2_6: J2.6 U7.9 U7.10
NetJ2_7: J2.7 U6.9 U6.10
NetJ2_8: J2.8 U6.12 U6.13
NetJ3_1: J3.1 K1.4
NetJ3_2: J3.2 K1.3
NetJ3_3: J3.3 K2.4
NetJ3_4: J3.4 K2.3
NetJ3_5: J3.5 K3.4
NetJ3_6: J3.6 K3.3
NetJ3_7: J3.7 U1.81
NetK1_1: K1.1 R7.2
NetK2_1: K2.1 R8.2
NetK3_1: K3.1 R9.2
NetL1_1: L1.1 U3.7
NetP1_2: P1.2 U1.72
NetP1_4: P1.4 U1.76
NetP1_6: P1.6 U1.89
NetP1_10: P1.10 SW1.1
NetR2_1: R2.1 U2.8
NetR3_2: R3.2 R5.1 U4.4
NetR4_2: R4.2 R6.1 U5.4
NetR7_1: R7.1 U1.58
NetR8_1: R8.1 U1.54
NetR9_1: R9.1 U1.55
NetU1_29: U1.29 U4.3
NetU1_30: U1.30 U5.3
NetU1_62: U1.62 U6.5
NetU1_70: U1.70 U2.4
NetU1_71: U1.71 U2.1
NetU1_84: U1.84 U6.3
NetU1_92: U1.92 U7.3
NetU1_95: U1.95 U7.5
VCC: C5.1 C6.2 C8.2 C9.2 C10.2 C11.2 C12.2 C13.2 C14.1 C15.1 C16.1 C17.1 L1.2 P1.1 U1.6 U1.11 U1.19 U1.21 U1.22 U1.28 U1.50 U1.75 U1.100 U2.3 U3.6
pads on no net: J1.1 J2.11 J2.12 J3.8 J3.9 J3.10 J3.11 J3.12 P1.7 P1.8 U1.1 U1.2 U1.3 U1.4 U1.5 U1.7 U1.8 U1.9 U1.12 U1.13 U1.15 U1.16 U1.17 U1.18 U1.23 U1.24 U1.25 U1.26 U1.31 U1.32 U1.35 U1.36 U1.37 U1.38 U1.39 U1.40 U1.41 U1.42 U1.43 U1.44 U1.45 U1.46 U1.47 U1.48 U1.51 U1.52 U1.53 U1.56 U1.57 U1.59 U1.60 U1.61 U1.63 U1.64 U1.65 U1.66 U1.67 U1.68 U1.69 U1.77 U1.78 U1.79 U1.80 U1.82 U1.83 U1.85 U1.86 U1.87 U1.88 U1.90 U1.91 U1.93 U1.94 U1.96 U1.97 U1.98 U2.5 U6.4 U6.6 U6.11 U7.4 U7.6 U7.11
copper on no net:
  other v1: 63.4,45.717

## Polygon pours and split planes (outlines as drawn)
GND on Layer 1 (split plane): 84.59,83.39 84.59,0.51 0.51,0.51 0.51,83.39
VCC on Layer 2 (split plane): 84.59,83.39 84.59,0.51 0.51,0.51 0.51,83.39